# Altium PCB CFT.PcbDoc
Units mil, origin at the board's own origin, x right, y up, seen from the top; angles counter-clockwise.
Board outline 1095 x 1990 mil, 2 copper layers (Top Layer, Bottom Layer); 10 components, 13 nets, 59 pads, 2 vias.
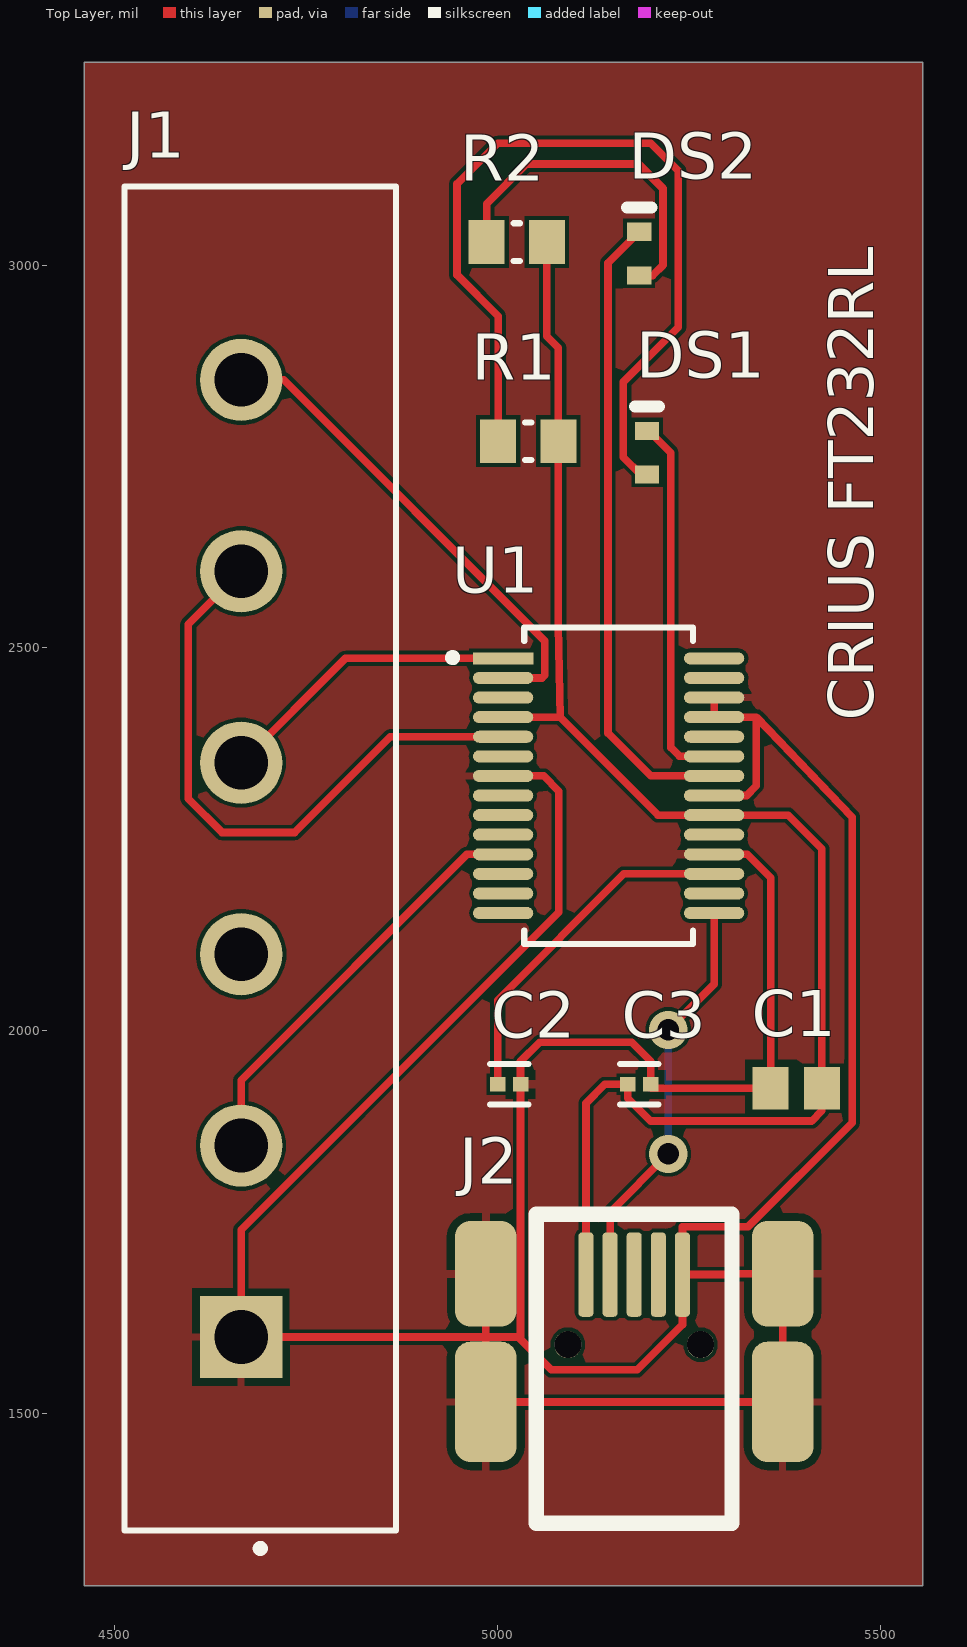
[diagram p0: Top Layer view]
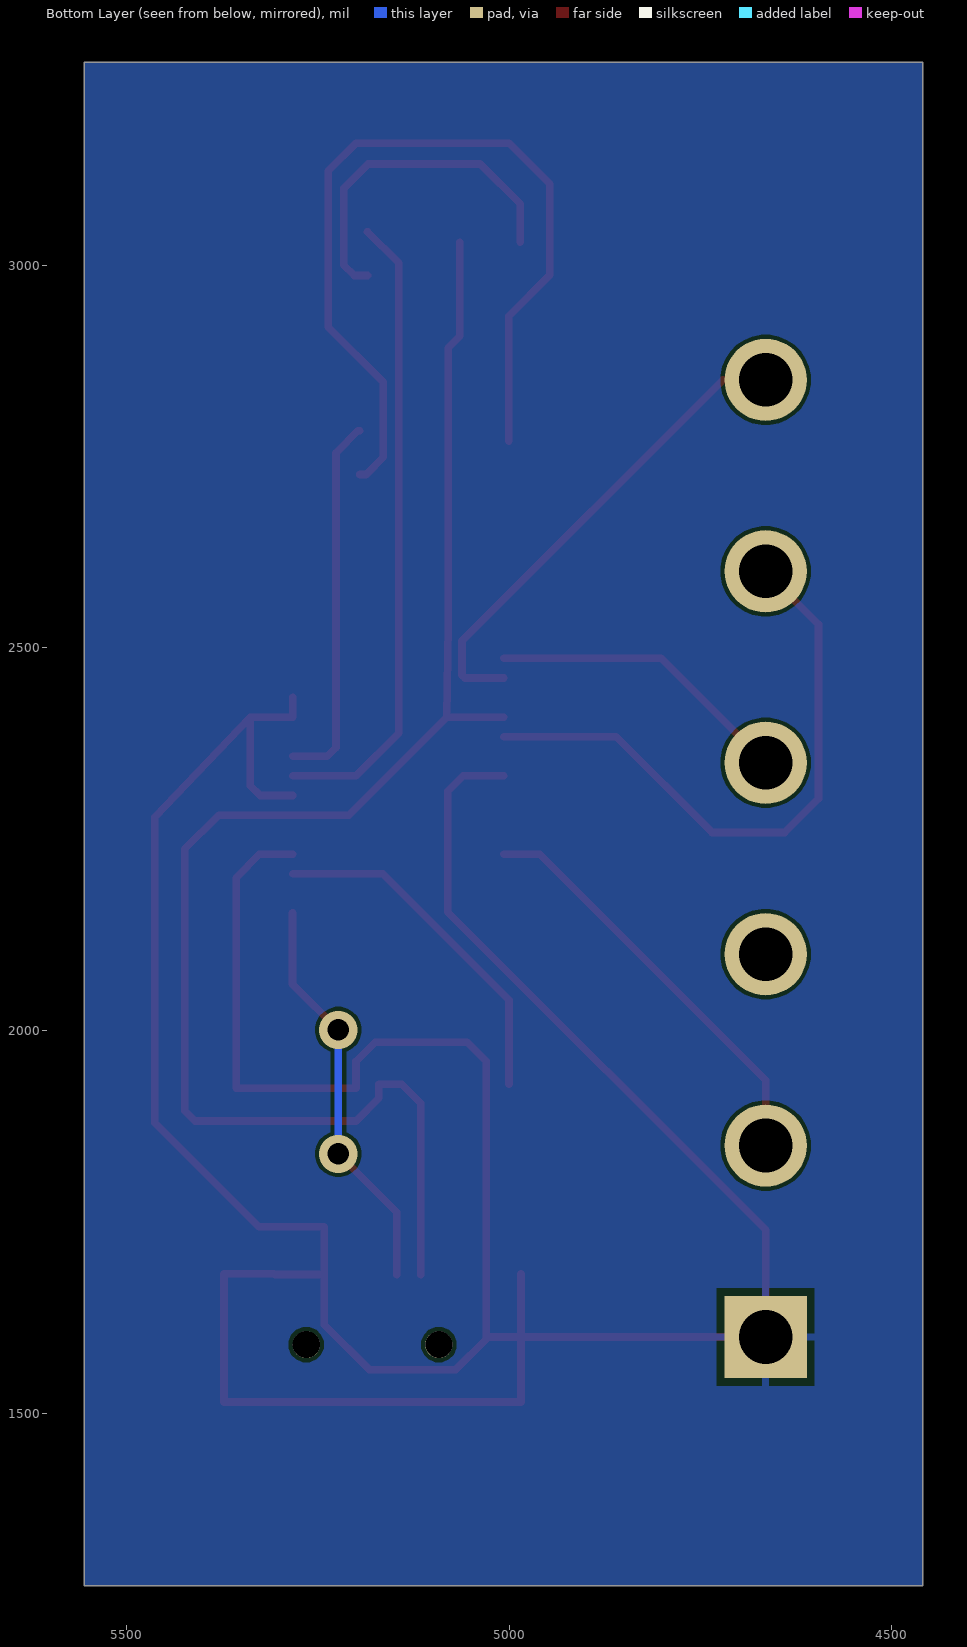
[diagram p1: Bottom Layer view, seen from below]
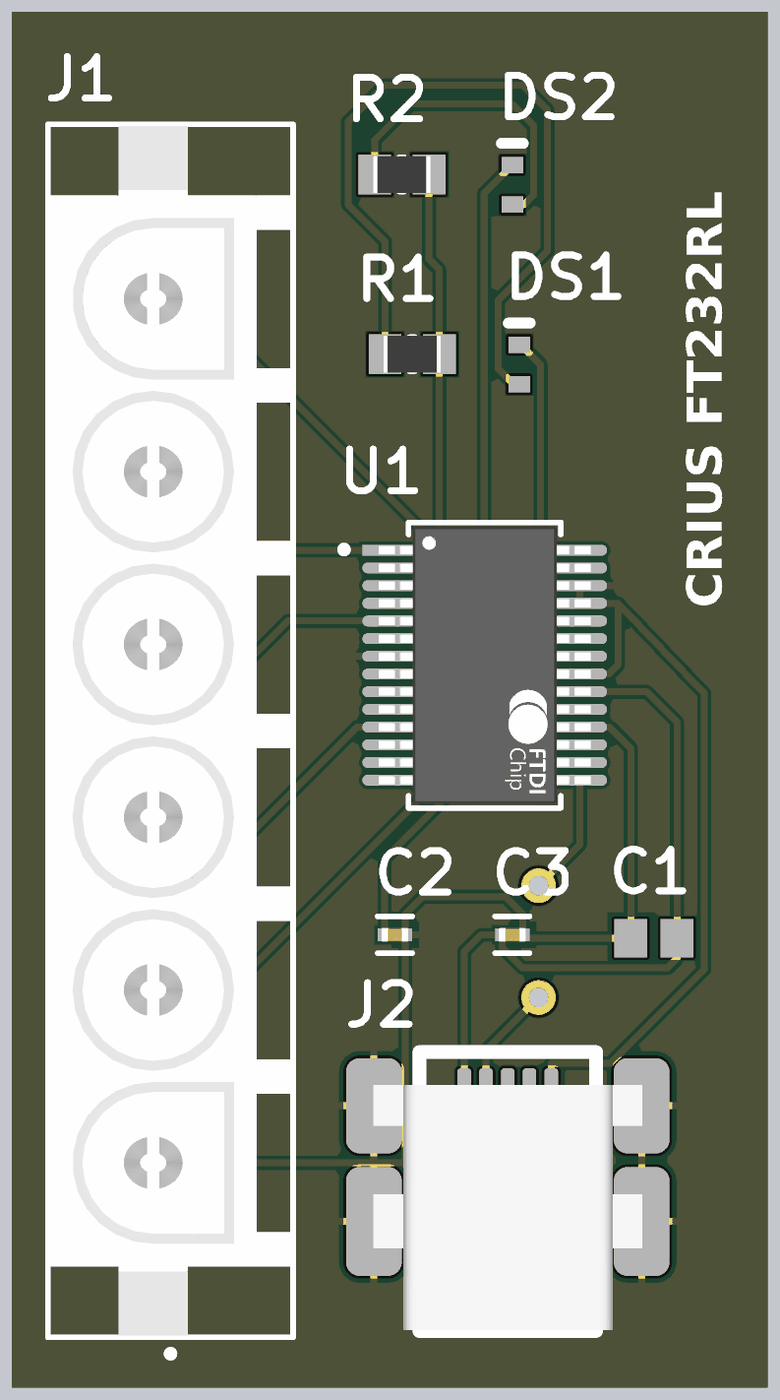
[diagram p2: 3D render of the assembled board from above, using the file's embedded part models]

## Layer stack, top to bottom
Top Solder: solder mask 0.4, Solder Resist, Dk 3.5
Top Layer: signal copper 1.4
Dielectric 1: dielectric 12.6, FR-4, Dk 4.8
Bottom Layer: signal copper 1.4
Bottom Solder: solder mask 0.4, Solder Resist, Dk 3.5

## Board outline
4460,1275 4460,3265 5555,3265 5555,1275

## Design rules (kind name [scope] priority, off if disabled: settings)
Clearance [All] p1: gap=5 ignorepadtopadclearanceinfootprint=FALSE
PolygonConnect [All] p1: connectstyle=Relief reliefconductorwidth=10 reliefentries=4 polygonreliefangle="90 Angle" airgapwidth=10
RoutingVias [All] p1: holewidth=28 width=50 viastyle="Through Hole" minholewidth=28 minwidth=50 maxholewidth=28 maxwidth=50
SolderMaskExpansion [All] p1: expansion=4 istentingtop=FALSE
SupplyNets "Schematic Supply Nets_2" [InNet('+3')] p1: voltage=0.000
SupplyNets "Schematic Supply Nets_1" [InNet('+5')] p2: voltage=0.000
SupplyNets "Schematic Supply Nets" [InNet('GND')] p3: voltage=0.000
Width [All] p1: maxlimit=10 minlimit=10 preferedwidth=10
30 further rules are at their usual default settings.

## Components (designator, comment, footprint, x,y, rotation, side; value= is the part's Value field where it differs from the comment)
C1 "10uF" CAPC2013X135X45NL10T25 5390,1925 r0 top
C2 "0.1uF" FP-GCM155-0_05-IPC_C 5015,1930 r0 top
C3 "0.1uF" FP-GCM155-0_05-IPC_C 5185,1930 r0 top
DS1 "Red" VISH-TLMX1100_V 5195,2755 r90 top
DS2 "TLMS1100-GS08" VISH-TLMX1100_V 5185,3015 r90 top
J1 "641831-1" FP-641831-1-MFG 4690,2225 r90 top
J2 "67503-1020" MOLX-67503-1020_V 5115.39,1681.53 r90 top
R1 "1k" RESC2013X60X35ML10T20 5040,2770 r0 top
R2 "1k" RESC2013X60X35ML10T20 5025,3030 r0 top
U1 "FT232RL-REEL" FP-SSOP-28-MFG 5145,2320 r0 top

## Footprints (in the part's own frame and the unit in brackets; to place one, negate y for a bottom-side part, rotate by r counter-clockwise, add the part's x,y. Pads: shape width x height; smd on the part's side, far side on the other; paste and mask are expansions set on the pad)
CAPC2013X135X45NL10T25 [mm] "Chip Capacitor, 2-Leads, Body 2.00x1.25mm, IPC Medium Density"
  rect 1.2x1.4 smd: 1(-0.85,0) 2(0.85,0)
  body extent -1.05,-0.67 1.05,0.67, height 1.35
FP-641831-1-MFG [mm]
  rect 2.73x2.73 hole 1.78 paste-2539.97 mask+0: 1(-15.875,0.635)
  round 2.73 hole 1.78 paste-2539.97 mask+0: 2(-9.525,0.635) 3(-3.175,0.635) 4(3.175,0.635) 5(9.525,0.635) 6(15.875,0.635)
  silkscreen extent -23.01,-4.51 22.29,4.51, body extent -22.39,-4.61 22.39,4.61, height 0.25
FP-GCM155-0_05-IPC_C [mil]
  rect 20.29x18.6 smd paste+0 mask+0: 1(-14.9,0) 2(14.9,0)
  silkscreen extent -25,-27 25,27, body extent -29,-15 29,15, height 10
FP-SSOP-28-MFG [mm]
  rect 2x0.4 smd paste+0 mask+0: 1(-3.5,4.225)
  rrect100% 2x0.4 smd paste+0 mask+0: 2(-3.5,3.575) 3(-3.5,2.925) 4(-3.5,2.275) 5(-3.5,1.625) 6(-3.5,0.975) 7(-3.5,0.325) 8(-3.5,-0.325) 9(-3.5,-0.975) 10(-3.5,-1.625) 11(-3.5,-2.275) 12(-3.5,-2.925) 13(-3.5,-3.575) 14(-3.5,-4.225) 15(3.5,-4.225) 16(3.5,-3.575) 17(3.5,-2.925) 18(3.5,-2.275) 19(3.5,-1.625) 20(3.5,-0.975) 21(3.5,-0.325) 22(3.5,0.325) 23(3.5,0.975) 24(3.5,1.625) 25(3.5,2.275) 26(3.5,2.925) 27(3.5,3.575) 28(3.5,4.225)
  silkscreen extent -5.3,-5.25 2.8,5.25, body extent -4.6,-5.55 4.6,5.55, height 0.25
MOLX-67503-1020_V [mm] "Mini USB Connector, SMT, Righer Angle"
  rrect50% 2.8x0.5 smd: 1(0,0) 2(0,-0.8) 3(0,-1.6) 4(0,-2.4) 5(0,-3.2)
  rrect50% 3.5x2.05 smd: 6(0.025,3.325) 8(0.025,-6.525)
  rrect50% 4x2.05 smd: 7(-4.225,3.325) 9(-4.225,-6.525)
  round 0.9 hole 0.9 unplated: X(-2.325,-3.8) Y(-2.325,0.6)
  silkscreen extent -8.25,-4.85 2,1.65, body extent -8.22,-6.56 0.78,3.34, height 3.95
RESC2013X60X35ML10T20 [mm] "Chip Resistor, 2-Leads, Body 2.1x1.35mm, IPC Low Density"
  rect 1.2x1.45 smd: 1(-1,0) 2(1,0)
  silkscreen extent -0.1,-0.62 0.1,0.62, body extent -1.05,-0.68 1.05,0.67, height 0.6
VISH-TLMX1100_V [mm] "SMD, 2-Leads, Body 1.6x0.8mm"
  rect 0.6x0.8 smd: 1(-0.725,0) 2(0.725,0)
  silkscreen extent 1.53,-0.4 1.53,0.4, body extent -0.8,-0.4 0.8,0.4, height 0.65

## Part data
C1: library part CMP-2007-03514-1, Manufacturer=Murata, Part Number=GRM21BF51C106ZE15L
C2 C3: library part CMP-2008-03711-3, "Ceramic Capacitor for Automotive 100nF ±10% 16VDC X7R 0402 Paper T/R", Capacitance=100nF, Case Code (Imperial)=0402, Case Code (Metric)=1005, Dielectric=X7R, Max Operating Temperature=125°C, Min Operating Temperature=-55°C, Package Quantity=1, Ratings=AEC-Q200, Tolerance=10%, Voltage=16V, Case/Package=0402, Depth=0.5mm, Height=0.5mm, Lead Free="Lead Free", Length=1mm, Mount="Surface Mount", Packaging="Tape and Reel", Radiation Hardening=No, REACH SVHC="No SVHC", Termination=SMD/SMT, Thickness=0.022inch, Voltage Rating=16V, Voltage Rating (DC)=16V, Width=0.02inch
DS1 DS2: library part CMP-1666-00027-1, "LED, RED, 2.1 V, -40 to 100 degC, 2-Pin SMD (0603), RoHS, Tape and Reel", Capacitance="12 pF", Case Code (Imperial)=0603, Case Code (Metric)=1608, Max Operating Temperature=125degC, Min Operating Temperature=-55degC, Package Quantity=4000, Resistance="100000000000 Ohm", Tolerance=5%, Type (Capacitors)=C0G, Voltage Rating="50 V", Case/Package=0603, ComponentLink1Description="Manufacturer URL", ComponentLink1URL=http://www.vishay.com/, ComponentLink2Description=Datasheet, ComponentLink2URL=http://www.vishay.com/docs/83173/tlmb1100.pdf, DatasheetVersion="Rev. 2.7, 03/2016", Height="0.8 mm", Length="1.6 mm", Mount="Surface Mount", PackageDescription="2-Pin Surface Mount Device, Body 1.6 x 0.8 mm", PackageReference=TLMX1100, Packaging="Tape and Reel", Pins=2, Radiation Hardening=No, REACH SVHC="No SVHC", RoHSCompliant=True, Voltage Rating (DC)="50 V", Width="0.8 mm"
J1: library part CMP-03369-000074-1, "CONN HEADER VERT 6POS 6.35MM", Current Rating=19A, Manufacturer=TE, Temperature="-55°C to +105°C", Temperature Range High=+105°C, Temperature Range Low=-55°C, Voltage Rating=600V, Automotive=No, Category=Conn, ComponentLink2Description=Datasheet, ComponentLink2URL=https://www.te.com/usa-en/product-641831-1.html?te_bu=Cor&te_type=other&te_campaign=oct_glo_cor-oct-global-oth-prtnr-fy19-oct-octo-buy-bom_sma-298_2&elqCampaignId=35216, Conn Gender=Male, Conn Orientation=Vertical, Contact Material=Gold,Nickel, Device Class L1=Connectors, Device Class L2="Headers and Wire Housings", Device Class L3=unset, Digikey Description="CONN HEADER VERT 6POS 6.35MM", Height=14.99mm, Lead Free=Yes, Manufacturer Part Number=641831-1, Mouser Description="Pin & Socket Connectors 6P PIN HDR ASSY", Number of Contacts=6, Number of Rows=1, Octopart=https://octopart.com/641831-1-te+connectivity-40465174, Package=641831-1, Pitch=6.35mm, RoHS=TRUE, Standoff Height=0.63mm
J2: library part CMP-0411-00002-1, "USB, MINI, SMD, RA KME04-USBMU03A01", Manufacturer=Molex, ComponentLink1Description="Manufacturer URL", ComponentLink1URL=http://www.molex.com/, ComponentLink2Description=Datasheet, ComponentLink2URL=http://www.molex.com/pdm_docs/sd/675031020_sd.pdf, DatasheetVersion="Rev F, 06/2009", Mounting Technology="Surface Mount", PackageDescription="Mini USB Connector, SMT, Righer Angle", PackageReference=67503-1020, PartNumber=67503-1020, Terminal Pitch="0.8 mm"
R1 R2: library part CMP-2100-03671-1, "Chip Resistor, 1 KOhm, +/- 1%, 125 mW, -55 to 155 degC, 0805 (2012 Metric), RoHS, Tape and Reel", Case Code (Imperial)=0805, Case Code (Metric)=2012, Manufacturer=Yageo, Max Operating Temperature=155degC, Max Power Dissipation=125mW, Min Operating Temperature=-55degC, Package Description="2-Pin Surface Mounted Device, Body 2 x 1.25 mm", Package Quantity=1, Resistance=1KOhm, Temperature Coefficient=100ppm/degreesC, Tolerance=1%, Voltage Rating=150V, Case/Package=0805, Composition=ThickFilm, Datasheet URL=http://www.yageo.com/NewPortal/yageodocoutput?fileName=/pdf/R-Chip/PYu-RC_Group_51_RoHS_L_5.pdf, Datasheet Version="Rev. 5, 10/2016", Depth=1.25mm, Height=0.024inch, Lead Free=LeadFree, Length=0.079inch, Manufacturer URL=http://www.yageo.com/, Military Standard=Not, Number of Pins=2, Number of Terminations=2, Package Reference=0805, Packaging=TapeandReel, Power Rating=125mW, REACH SVHC=Unknown, RoHSCompliant=true, Termination=SMD/SMT, Voltage Rating (DC)=150V, Width=0.049inch
U1: library part CMP-0078-00029-4, "IC USB FS SERIAL UART 28-SSOP", Case/Package=SSOP, Max Operating Temperature=85°C, Max Supply Voltage=5.25V, Min Operating Temperature=-40°C, Min Supply Voltage=3.3V, Operating Supply Current=15mA, Package Quantity=2000, Voltage=5V, Data Rate=12Mbps, Height=1.75mm, Interface=UART, Lead Free="Lead Free", Length=10.2mm, Mount="Surface Mount", Number of Channels=1, Number of Pins=28, Number of Transceivers=1, Packaging="Tape and Reel", Radiation Hardening=No, REACH SVHC="No SVHC", Weight=0.080001oz, Width=5.3mm

## Via types
v1: diameter 50, hole 28, Top Layer to Bottom Layer, 2 vias

## Nets (pads, with @x,y where several pads share a name; then routed paths per layer and width w, separated by ;. In a path a pad name is that pad's centre, name@x,y a point inside that pad or via, vN(x,y) a via of type N, cw(c..) or ccw(c..) an arc to the next point about the centre after c; other vN are vias at no path point)
+3: C2.1 U1.17 | length 461
  Top Layer w10: C2.1 5000.1,2040 5164.94,2204.84 U1.17
+5: C1.2 C3.1 J2.1 R1.2 R2.2 U1.4 U1.20 | length 2034.4
  Top Layer w10: U1.4 5081.58,2409.57 ; R2.2 5064.37,2907 5079.37,2892 R1.2 5079.37,2529.21 5081.58,2409.57 ; J2.1 5115.39,1905.39 5140,1930 C3.1 5170.1,1911.9 5200,1882 5410,1882 5423.46,1895.46 C1.2 5423.46,2237.54 5379.39,2281.61 U1.20 5209.53,2281.61 5081.58,2409.57
GND: C1.1 C2.2 C3.2 J1.1 J2.5 J2.6 J2.7 J2.8 J2.9 U1.7 U1.18 U1.21 U1.25 U1.26 | length 4761.3
  Top Layer w10: J2.6 4984.49,1600 ; U1.7 5060,2332.8 5080,2312.8 5080,2155 4665,1740 J1.1 4984.49,1600 ; U1.18 5326.1,2230.43 5356.54,2200 C1.1 5199.9,1925 C3.2 5199.9,1960 5175,1984.9 5054.81,1984.9 5029.9,1960 C2.2 5029.9,1597.1 ; U1.21 5325.2,2307.2 5338,2320 5338,2409.57 ; U1.26 U1.25 5338,2409.57 ; 4984.49,1600 J2.7 J2.9 J2.8 5306.99,1682.52 5306,1681.53 J2.5 ; 4984.49,1600 5027,1600 5029.9,1597.1 ; 5029.9,1597.1 5070,1557 5182.38,1557 5241.38,1616 J2.5 ; J2.5 5241.38,1744 5327,1744 5463,1880 5463,2279 5338,2409.57
NetDS1_1: DS1.1 R1.1 | length 1127.9
  Top Layer w10: R1.1 5000.63,2933.37 4947,2987 4947,3106 5000,3159 5200,3159 5236,3123 5236,2919 5164.25,2847.25 5164.25,2749 5186.8,2726.46 DS1.1
NetDS1_2: DS1.2 U1.23 | length 489.5
  Top Layer w10: DS1.2 5197.53,2783.54 5226,2755.08 5226,2370 5237.61,2358.39 U1.23
NetDS2_1: DS2.1 R2.1 | length 451.8
  Top Layer w10: R2.1 4985.63,3080 5037.63,3132 5184,3132 5216,3100 5216,3000 5202.46,2986.46 DS2.1
NetDS2_2: DS2.2 U1.22 | length 833.5
  Top Layer w10: DS2.2 5144.25,3002.8 5144.25,2388.54 5200,2332.8 U1.22
NetJ1_2: J1.2 U1.11 | length 549.8
  Top Layer w10: J1.2 4665,1935.43 4960,2230.43 U1.11
NetJ1_3: J1.3
NetJ1_4: J1.4 U1.1 | length 398.7
  Top Layer w10: J1.4 4801.34,2486.34 U1.1
NetJ1_5: J1.5 U1.5 | length 806.8
  Top Layer w10: J1.5 4596,2531 4596,2303 4640,2259 4735,2259 4859.98,2383.98 U1.5
NetJ1_6: J1.6 U1.2 | length 638.4
  Top Layer w10: J1.6 4720.58,2850 5061.58,2509 5061.58,2464.32 5058,2460.75 U1.2
NetJ2_2: J2.2 U1.15 | length 528.7
  Top Layer w10: J2.2 5146.89,1763 v1(5223,1839.11) ; v1(5223,2001) 5283,2061 5283,2153.66 U1.15
  Bottom Layer w10: v1(5223,1839.11) v1(5223,2001)
pads on no net: J2.3 J2.4 J2.X J2.Y U1.3 U1.6 U1.8 U1.9 U1.10 U1.12 U1.13 U1.14 U1.16 U1.19 U1.24 U1.27 U1.28

## Polygon pours and split planes (outlines as drawn)
GND on Top Layer "GND_L01_P000" (solid, pour order 0): 4460,3265 5555,3265 5555,1275 4460,1275 4460,1310
GND on Bottom Layer "GND_L02_P001" (solid, pour order 1): 4460,3265 5555,3265 5555,1275 4460,1275

## Silkscreen, mask and mechanical layers (free items; w line width, h text height)
Top Overlay:
  text "CRIUS FT232RL" at 5510,2405 h100 r90